# Altium PCB fmc-320u-a1.PcbDoc (part 2 of 2)
Units mm, origin at the board's own origin, x right, y up, seen from the top; angles counter-clockwise.
Board outline 96 x 84 mm, 2 copper layers (L1, L2), stack 0.533 mm thick; 72 components, 120 nets, 399 pads, 155 vias.
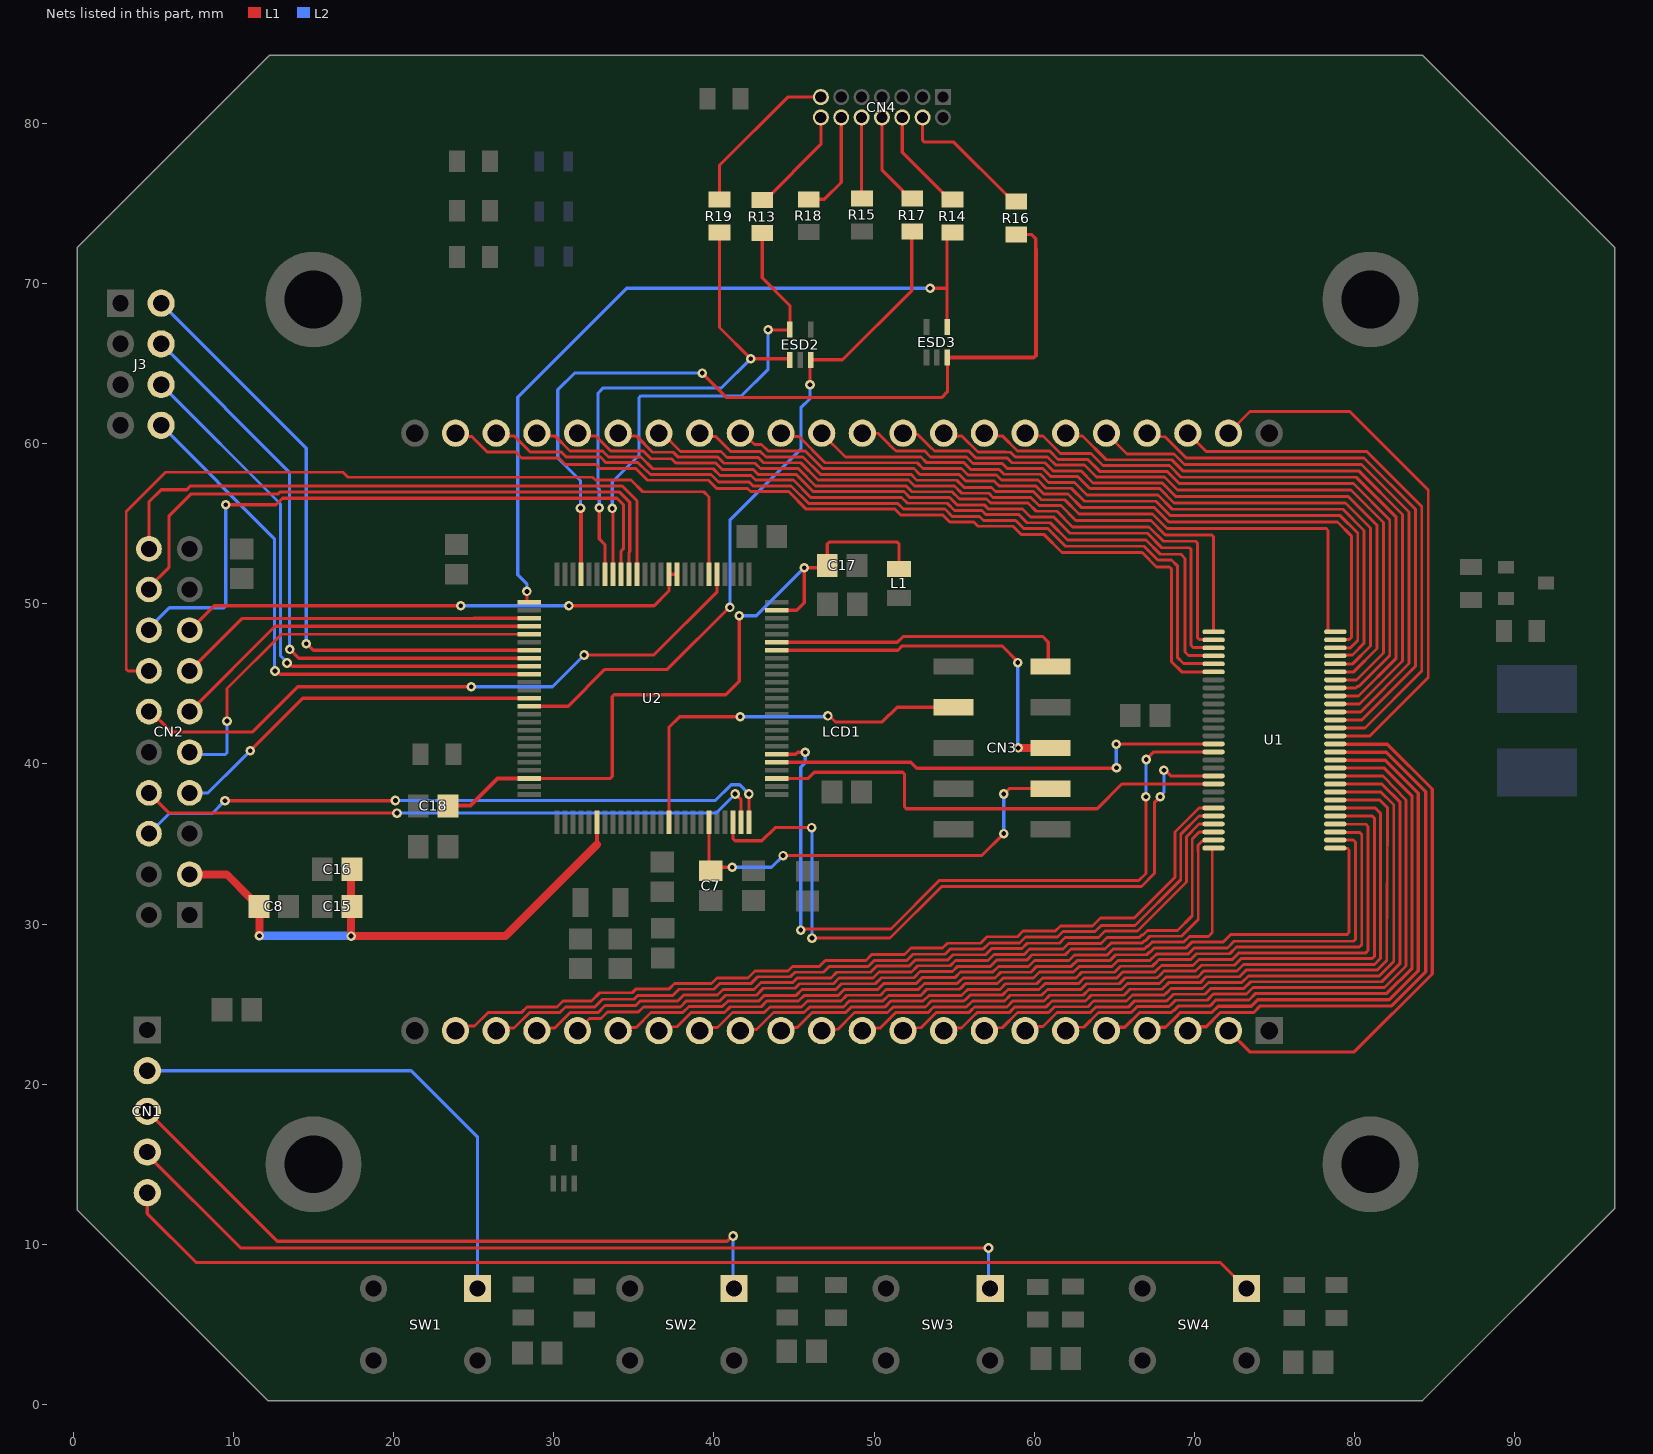
[diagram p2: the nets of this part, all layers, seen from the top]

## Via types
v1: diameter 0.6, hole 0.3, L1 to L2, 155 vias

## Nets (pads, with @x,y where several pads share a name; then routed paths per layer and width w, separated by ;. In a path a pad name is that pad's centre, name@x,y a point inside that pad or via, vN(x,y) a via of type N, cw(c..) or ccw(c..) an arc to the next point about the centre after c; other vN are vias at no path point) (continued)
PA8: CN2.16 U2.67 | length 41.3
  L1 w0.2: v1(9.525,56.185) 12.66,56.185 13.066,56.591 33.954,56.591 34.35,56.195 34.35,53.425 34.2,53.275 U2.67@34.2,51.838
  L2 w0.2: CN2.16@4.73,48.475 6.005,49.75 9.408,49.75 9.525,49.867 v1(9.525,56.185)
PAD_DOWN: CN1.5 SW4.1 | length 71.9
  L1 w0.2: CN1.5@4.625,13.23 4.625,11.925 7.675,8.875 71.625,8.875 SW4.1@73.25,7.25
PAD_ENTER: CN1.3 SW2.1 | length 43.4
  L1 w0.2: CN1.3@4.625,18.31 12.735,10.2 40.825,10.2 41.15,10.525 v1(41.2,10.525)
  L2 w0.2: v1(41.2,10.525) 41.2,7.3 SW2.1@41.25,7.25
PAD_ESC: CN1.2 SW1.1 | length 31.9
  L2 w0.2: CN1.2@4.625,20.85 4.725,20.75 4.825,20.85 21.1,20.85 25.25,16.7 SW1.1@25.25,7.25
PAD_UP: CN1.4 SW3.1 | length 57.7
  L1 w0.2: CN1.4@4.625,15.77 4.625,15.6 10.45,9.775 v1(57.15,9.775)
  L2 w0.2: v1(57.15,9.775) 57.15,7.35 SW3.1@57.25,7.25
PB10: CN3.5 U2.44 | length 23.2
  L1 w0.2: U2.44@43.938,47.1 51.494,47.1 51.765,47.371 57.988,47.371 58.979,46.38 v1(58.979,46.33) ; CN3.5@60.464,41 60.664,41.2 60.944,40.919 CN3.5@61.025,41
  L1 w0.5: v1(59,41) CN3.5@60.464,41
  L2 w0.2: v1(58.979,46.33) 58.979,41.021 v1(59,41)
PB11: CN3.9 U2.45 | length 18.8
  L1 w0.2: U2.45@43.938,47.6 51.457,47.6 51.812,47.955 60.528,47.955 60.876,47.607 60.876,46.229 CN3.9@61.025,46.08
PC8: CN2.20 U2.65 | length 38.6
  L1 w0.2: CN2.20@4.73,53.555 4.73,56.354 5.501,57.125 7.087,57.125 7.314,57.351 34.269,57.351 35.2,56.42 U2.65@35.2,51.838
PC9: CN2.18 U2.66 | length 39.2
  L1 w0.2: CN2.18@4.73,51.015 5.975,52.26 5.975,55.475 7.345,56.845 12.783,56.845 12.909,56.971 34.111,56.971 34.75,56.333 34.75,53.259 34.7,53.209 U2.66@34.7,51.838
PCF8553_CE: U1.20 U2.28 | length 30.2
  L1 w0.2: U2.28@43.938,39.1 45.9,39.1 46.275,39.475 51.783,39.475 51.9,39.358 51.9,37.317 52.017,37.2 63.925,37.2 65.475,38.75 U1.20@71.2,38.75
PCF8553_RESET: U1.15 U2.30 | length 28.9
  L1 w0.2: U2.30@43.938,40.1 52.3,40.1 52.675,39.725 65.1,39.725 v1(65.138,39.763) ; v1(65.125,41.225) 65.15,41.25 U1.15@71.2,41.25
  L2 w0.2: v1(65.125,41.225) 65.125,39.775 v1(65.138,39.763)
PCF8553_SCL: U1.19 U2.23 | length 46.2
  L1 w0.18: v1(46.125,29.125) 50.994,29.125 54.224,32.354 66.695,32.354 67.5,33.159 67.5,37.575 v1(67.875,37.95)
  L1 w0.2: U2.23@41.2,36.362 41.2,35.317 41.317,35.2 43.001,35.2 43.826,36.025 v1(46.1,36.025) ; v1(68.1,39.6) 68.178,39.6 68.528,39.25 U1.19@71.2,39.25
  L2 w0.2: v1(46.1,36.025) 46.125,36 v1(46.125,29.125) ; v1(67.875,37.95) 67.875,38.006 68.1,38.231 v1(68.1,39.6)
PCF8553_SDIO: U1.16 U2.31 | length 47.6
  L1 w0.18: v1(45.425,29.625) 45.495,29.695 51.055,29.695 54.075,32.714 60.972,32.714 60.973,32.715 66.523,32.715 66.975,33.168 v1(66.975,37.95)
  L1 w0.2: U2.31@43.938,40.6 45.1,40.6 45.225,40.725 v1(45.7,40.725) ; v1(67,40.275) 67.475,40.75 U1.16@71.2,40.75
  L2 w0.2: v1(45.425,29.625) 45.425,39.8 45.7,40.075 v1(45.7,40.725) ; v1(66.975,37.95) 66.975,40.25 v1(67,40.275)
PD1: J3.2 U2.82 | length 39.1
  L1 w0.2: v1(14.55,47.5) 14.599,47.5 14.999,47.1 U2.82@28.462,47.1
  L2 w0.2: J3.2@5.49,68.765 14.55,59.705 v1(14.55,47.5)
PD2: J3.4 U2.83 | length 37.6
  L1 w0.2: v1(13.525,47.15) 14.075,46.6 U2.83@28.462,46.6
  L2 w0.2: J3.4@5.49,66.225 13.5,58.215 v1@13.5,47.15
PD3: J3.6 U2.84 | length 35.8
  L1 w0.2: v1(13.35,46.3) 13.458,46.3 13.658,46.1 U2.84@28.462,46.1
  L2 w0.2: J3.6@5.49,63.685 12.945,56.23 12.945,46.744 13.35,46.339 v1(13.35,46.3)
PD4: J3.8 U2.85 | length 34.2
  L1 w0.2: v1(12.6,45.8) 12.708,45.8 12.908,45.6 U2.85@28.462,45.6
  L2 w0.2: J3.8@5.49,61.145 12.565,54.07 12.565,45.835 v1(12.6,45.8)
PD7: CN2.7 U2.88 | length 23.6
  L1 w0.2: v1(11.049,40.818) 14.331,44.1 U2.88@28.462,44.1
  L2 w0.2: CN2.7@7.27,38.19 8.414,38.19 10.524,40.3 10.531,40.3 v1(11.049,40.818)
PULSE_OUT_CMP: CN2.15 U2.60 U2.61 | length 32.4
  L1 w0.2: CN2.15@7.27,48.475 7.395,48.475 8.795,49.875 v1(24.2,49.875) ; v1(30.95,49.875) 36.266,49.875 37.201,50.81 37.201,51.837 U2.61@37.2,51.838 ; U2.61@37.201,51.789 37.25,51.838 U2.60@37.7,51.838
  L2 w0.2: v1(24.2,49.875) v1(30.95,49.875)
RTD_IN: CN3.8 U2.15 | length 24.6
  L1 w0.2: U2.15@37.2,36.362 37.2,42.291 37.859,42.95 v1(41.65,42.95) ; v1(47.117,43.002) 47.211,43.002 47.593,42.62 48.315,42.62 48.316,42.621 50.521,42.621 51.439,43.54 CN3.8@55,43.54
  L2 w0.2: v1(41.65,42.95) 47.065,42.95 v1(47.117,43.002)
SEG0: LCD1.21 U1.23 | length 54.7
  L1 w0.18: LCD1.21@23.87,23.35 24.161,23.641 25.063,23.641 25.892,24.47 27.977,24.47 28.337,24.83 30.216,24.83 30.578,25.192 32.361,25.192 32.88,25.711 34.904,25.711 35.152,25.959 37.211,25.959 37.541,26.289 39.854,26.289 40.205,26.64 42.134,26.64 42.566,27.072 44.625,27.072 44.908,27.356 46.584,27.356 46.96,27.732 49.501,27.732 49.861,28.092 51.893,28.092 52.3,28.499 54.28,28.499 54.585,28.804 56.643,28.804 57.05,29.21 58.955,29.21 59.306,29.561 61.312,29.561 61.643,29.891 63.644,29.891 64.131,30.378 66.242,30.378 68.788,32.924 68.788,35.754 70.283,37.25 U1.23@71.2,37.25
SEG1: LCD1.20 U1.24 | length 52
  L1 w0.18: LCD1.20@26.41,23.35 26.574,23.514 27.53,23.514 28.486,24.47 30.365,24.47 30.727,24.832 32.567,24.832 33.045,25.311 35.013,25.311 35.254,25.552 37.44,25.552 37.816,25.929 40.003,25.929 40.354,26.28 42.308,26.28 42.739,26.712 44.774,26.712 45.057,26.996 46.845,26.996 47.205,27.356 49.634,27.356 50.01,27.732 52.042,27.732 52.428,28.118 54.432,28.118 54.758,28.444 56.815,28.444 57.201,28.829 59.083,28.829 59.455,29.201 61.461,29.201 61.792,29.531 63.793,29.531 64.183,29.921 66.294,29.921 69.148,32.775 69.148,35.605 70.292,36.75 U1.24@71.2,36.75
SEG2: LCD1.19 U1.25 | length 49.3
  L1 w0.18: LCD1.19@28.95,23.35 29.114,23.514 30.07,23.514 31.026,24.47 32.77,24.47 33.211,24.911 35.122,24.911 35.404,25.192 37.74,25.192 38.117,25.569 40.225,25.569 40.576,25.92 42.506,25.92 42.938,26.352 44.923,26.352 45.207,26.636 47.311,26.636 47.671,26.996 49.783,26.996 50.16,27.372 52.192,27.372 52.577,27.758 54.606,27.758 54.931,28.084 56.965,28.084 57.35,28.469 59.232,28.469 59.566,28.804 61.573,28.804 61.925,29.156 64.016,29.156 64.422,29.561 66.443,29.561 69.508,32.626 69.508,35.456 70.297,36.245 71.195,36.245 U1.25@71.2,36.25
SEG3: LCD1.18 U1.26 | length 47.6
  L1 w0.18: LCD1.18@31.49,23.35 32.245,24.105 32.944,24.105 33.35,24.511 35.281,24.511 35.602,24.832 37.913,24.832 38.29,25.209 40.374,25.209 40.725,25.56 42.656,25.56 43.087,25.992 45.072,25.992 45.356,26.276 47.461,26.276 47.821,26.636 49.932,26.636 50.309,27.012 52.341,27.012 52.726,27.398 54.755,27.398 55.081,27.724 57.114,27.724 57.499,28.109 59.381,28.109 59.715,28.444 61.794,28.444 62.146,28.796 64.165,28.796 64.539,29.17 66.561,29.17 66.71,29.319 66.791,29.319 67.071,29.599 68.946,29.599 69.868,30.521 69.868,35.307 70.311,35.75 U1.26@71.2,35.75
SEG4: LCD1.17 U1.27 | length 44.8
  L1 w0.18: LCD1.17@34.03,23.35 34.231,23.551 35.15,23.551 36.071,24.472 38.063,24.472 38.439,24.849 40.523,24.849 40.874,25.2 42.805,25.2 43.157,25.552 45.141,25.552 45.505,25.916 47.61,25.916 47.97,26.276 50.081,26.276 50.458,26.652 52.49,26.652 52.875,27.038 54.904,27.038 55.23,27.364 57.263,27.364 57.648,27.749 59.53,27.749 59.865,28.084 61.943,28.084 62.295,28.436 64.414,28.436 64.788,28.81 66.732,28.81 66.882,28.959 66.94,28.959 67.22,29.239 69.191,29.239 70.24,30.288 70.24,34.566 70.23,34.576 70.23,34.924 70.476,35.17 70.538,35.17 70.618,35.25 U1.27@71.2,35.25
SEG5: LCD1.16 U1.28 | length 42.4
  L1 w0.18: LCD1.16@36.57,23.35 36.811,23.591 37.69,23.591 38.588,24.489 40.672,24.489 41.023,24.84 42.954,24.84 43.306,25.192 45.29,25.192 45.65,25.552 47.777,25.552 48.141,25.916 50.23,25.916 50.603,26.289 52.635,26.289 53.024,26.678 55.075,26.678 55.401,27.004 57.412,27.004 57.764,27.356 59.646,27.356 60.014,27.724 62.166,27.724 62.518,28.076 64.563,28.076 64.938,28.45 66.881,28.45 67.031,28.599 67.09,28.599 67.369,28.879 69.34,28.879 69.692,29.231 70.883,29.231 71.12,29.468 71.12,34.695 71.145,34.695 U1.28@71.2,34.75
SEG6: LCD1.15 U1.29 | length 49.1
  L1 w0.18: LCD1.15@39.11,23.35 39.298,23.538 40.23,23.538 41.172,24.48 43.149,24.48 43.501,24.832 45.48,24.832 45.84,25.192 47.937,25.192 48.3,25.556 50.397,25.556 50.751,25.91 52.766,25.91 53.145,26.289 55.19,26.289 55.288,26.386 55.293,26.386 55.55,26.644 57.561,26.644 57.913,26.996 59.795,26.996 60.163,27.364 62.315,27.364 62.667,27.716 64.712,27.716 65.087,28.09 67.03,28.09 67.18,28.239 67.239,28.239 67.518,28.519 69.489,28.519 69.841,28.871 71.797,28.871 72.288,29.362 79.545,29.362 79.65,29.468 79.65,34.633 79.552,34.731 78.819,34.731 U1.29@78.8,34.75
SEG7: LCD1.14 U1.30 | length 48.2
  L1 w0.18: LCD1.14@41.65,23.35 41.711,23.411 42.665,23.411 43.726,24.472 45.629,24.472 45.989,24.832 48.086,24.832 48.45,25.196 50.546,25.196 50.9,25.55 52.915,25.55 53.294,25.929 55.34,25.929 55.437,26.026 55.442,26.026 55.699,26.284 57.71,26.284 58.062,26.636 59.961,26.636 60.325,27 62.461,27 62.816,27.356 64.862,27.356 65.236,27.73 67.227,27.73 67.376,27.879 67.388,27.879 67.652,28.143 69.623,28.143 69.99,28.511 72.064,28.511 72.479,28.926 79.94,28.926 80.05,29.036 80.05,35.133 79.933,35.25 U1.30@78.8,35.25
SEG8: LCD1.13 U1.31 | length 47.1
  L1 w0.18: LCD1.13@44.19,23.35 44.378,23.538 45.205,23.538 46.139,24.472 48.235,24.472 48.599,24.836 50.695,24.836 51.049,25.19 53.064,25.19 53.424,25.55 55.47,25.55 55.586,25.666 55.591,25.666 55.848,25.924 57.859,25.924 58.211,26.276 60.159,26.276 60.524,26.64 62.61,26.64 62.966,26.996 65.011,26.996 65.385,27.37 67.376,27.37 67.526,27.519 67.537,27.519 67.801,27.783 69.772,27.783 70.139,28.151 72.213,28.151 72.628,28.566 80.31,28.566 80.45,28.706 80.45,35.589 80.308,35.731 78.819,35.731 U1.31@78.8,35.75
SEG9: LCD1.12 U1.32 | length 46
  L1 w0.18: LCD1.12@46.73,23.35 46.817,23.437 47.745,23.437 48.784,24.476 50.844,24.476 51.199,24.83 53.213,24.83 53.573,25.19 55.619,25.19 55.735,25.306 55.74,25.306 55.997,25.564 58.008,25.564 58.361,25.916 60.309,25.916 60.673,26.28 62.759,26.28 63.115,26.636 65.16,26.636 65.534,27.01 67.525,27.01 67.675,27.159 67.686,27.159 67.95,27.423 69.921,27.423 70.289,27.791 72.362,27.791 72.777,28.206 80.706,28.206 80.85,28.35 80.85,36.089 80.708,36.231 78.819,36.231 U1.32@78.8,36.25
SEG10: LCD1.11 U1.33 | length 45
  L1 w0.18: LCD1.11@49.27,23.35 49.434,23.514 50.39,23.514 51.065,24.189 51.066,24.189 51.348,24.47 53.362,24.47 53.722,24.83 55.768,24.83 55.884,24.946 55.889,24.946 56.14,25.197 58.151,25.197 58.51,25.556 60.458,25.556 60.822,25.92 62.908,25.92 63.264,26.276 65.309,26.276 65.683,26.65 67.674,26.65 67.824,26.799 67.835,26.799 68.099,27.063 70.07,27.063 70.438,27.431 72.511,27.431 72.927,27.846 81.102,27.846 81.25,27.995 81.25,36.608 81.108,36.75 U1.33@78.8,36.75
SEG11: LCD1.10 U1.34 | length 43.7
  L1 w0.18: LCD1.10@51.81,23.35 51.989,23.529 52.93,23.529 53.871,24.47 55.917,24.47 56.033,24.586 56.038,24.586 56.282,24.83 58.293,24.83 58.659,25.196 60.607,25.196 60.971,25.56 63.057,25.56 63.413,25.916 65.458,25.916 65.832,26.29 67.823,26.29 67.973,26.439 67.984,26.439 68.248,26.703 70.219,26.703 70.587,27.071 72.661,27.071 73.072,27.483 81.247,27.483 81.61,27.846 81.61,36.934 81.294,37.25 U1.34@78.8,37.25
SEG12: LCD1.9 U1.35 | length 42.5
  L1 w0.18: LCD1.9@54.35,23.35 54.514,23.514 55.47,23.514 56.182,24.226 56.187,24.226 56.431,24.47 58.442,24.47 58.808,24.836 60.756,24.836 61.12,25.2 63.206,25.2 63.562,25.556 65.607,25.556 65.981,25.93 67.973,25.93 68.122,26.079 68.133,26.079 68.397,26.343 70.368,26.343 70.736,26.711 72.81,26.711 73.221,27.123 81.396,27.123 82.01,27.736 82.01,28.05 82.05,37.124 82.05,37.274 81.997,37.326 81.574,37.75 U1.35@78.8,37.75
SEG13: LCD1.8 U1.36 | length 41.1
  L1 w0.18: LCD1.8@56.89,23.35 57.069,23.529 58.01,23.529 58.957,24.476 60.905,24.476 61.269,24.84 63.356,24.84 63.711,25.196 65.756,25.196 66.13,25.57 68.122,25.57 68.271,25.719 68.282,25.719 68.546,25.983 70.517,25.983 70.885,26.351 72.959,26.351 73.371,26.763 81.546,26.763 82.45,27.667 82.45,37.29 82.45,37.439 82.397,37.492 81.639,38.25 U1.36@78.8,38.25
SEG14: LCD1.7 U1.37 | length 39.7
  L1 w0.18: LCD1.7@59.43,23.35 59.692,23.612 60.55,23.612 61.418,24.48 63.505,24.48 63.86,24.836 65.905,24.836 66.28,25.21 68.271,25.21 68.42,25.359 68.432,25.359 68.695,25.623 70.666,25.623 71.034,25.991 73.108,25.991 73.52,26.403 81.695,26.403 82.85,27.558 82.85,37.605 81.705,38.75 U1.37@78.8,38.75
SEG15: LCD1.6 U1.38 | length 38.3
  L1 w0.18: LCD1.6@61.97,23.35 62.176,23.556 63.09,23.556 64.009,24.476 66.054,24.476 66.429,24.85 68.42,24.85 68.569,24.999 68.581,24.999 68.829,25.248 70.8,25.248 71.183,25.631 73.257,25.631 73.669,26.043 81.87,26.043 83.21,27.383 83.21,37.754 83.16,37.806 81.876,39.145 81.771,39.25 U1.38@78.8,39.25
SEG16: LCD1.5 U1.39 | length 37
  L1 w0.2: LCD1.5@64.51,23.35 64.718,23.558 65.66,23.558 66.582,24.48 68.573,24.48 68.723,24.629 68.734,24.629 68.982,24.878 70.953,24.878 71.337,25.261 73.41,25.261 73.822,25.673 82.023,25.673 83.597,27.247 83.597,37.989 81.836,39.75 U1.39@78.8,39.75
SEG17: LCD1.4 U1.40 | length 35.6
  L1 w0.2: LCD1.4@67.05,23.35 67.057,23.343 67.273,23.558 68.2,23.558 68.891,24.249 69.122,24.48 71.093,24.48 71.48,24.867 73.553,24.867 73.96,25.273 82.161,25.273 83.977,27.089 83.977,38.175 81.921,40.231 78.819,40.231 U1.40@78.8,40.25
SEG18: LCD1.3 U1.41 | length 34.3
  L1 w0.2: LCD1.3@69.59,23.35 69.83,23.59 70.74,23.59 71.629,24.479 72.076,24.479 cw(c72.13,23.35) 72.184,24.479 73.703,24.479 74.116,24.892 82.317,24.892 84.45,27.025 84.45,38.268 81.987,40.731 78.819,40.731 U1.41@78.8,40.75
SEG19: LCD1.2 U1.42 | length 34
  L1 w0.2: LCD1.2@72.13,23.35 73.458,22.022 79.985,22.022 84.85,26.887 84.85,38.433 82.052,41.231 78.819,41.231 U1.42@78.8,41.25
SEG20: LCD1.43 U1.43 | length 34.1
  L1 w0.18: LCD1.43@72.13,60.65 73.48,62 79.7,62 84.6,57.1 84.6,45.4 80.95,41.75 U1.43@78.8,41.75
SEG21: LCD1.42 U1.44 | length 33.6
  L1 w0.18: LCD1.42@69.59,60.65 70.74,59.5 80.766,59.5 84.2,56.066 84.2,45.8 80.65,42.25 U1.44@78.8,42.25
SEG22: LCD1.41 U1.45 | length 34.9
  L1 w0.18: LCD1.41@67.05,60.65 67.274,60.426 68.17,60.426 69.496,59.1 80.6,59.1 83.8,55.9 83.8,46.1 80.45,42.75 U1.45@78.8,42.75
SEG23: LCD1.40 U1.46 | length 36.2
  L1 w0.18: LCD1.40@64.51,60.65 65.8,59.36 68.727,59.36 69.387,58.7 80.434,58.7 83.4,55.734 83.4,46.266 80.384,43.25 U1.46@78.8,43.25
SEG24: LCD1.39 U1.47 | length 37.6
  L1 w0.18: LCD1.39@61.97,60.65 62.149,60.471 63.02,60.471 64.501,58.99 68.588,58.99 69.278,58.3 80.269,58.3 83,55.569 83,46.431 80.319,43.75 U1.47@78.8,43.75
SEG25: LCD1.38 U1.48 | length 38.9
  L1 w0.18: LCD1.38@59.43,60.65 59.614,60.466 60.55,60.466 61.641,59.375 63.55,59.375 64.296,58.63 68.439,58.63 69.169,57.9 80.103,57.9 82.6,55.403 82.6,46.597 80.253,44.25 U1.48@78.8,44.25
SEG26: LCD1.37 U1.49 | length 40.3
  L1 w0.18: LCD1.37@56.89,60.65 57.054,60.486 58.01,60.486 58.966,59.53 60.977,59.53 61.492,59.015 63.345,59.015 64.09,58.27 68.29,58.27 69.06,57.5 79.937,57.5 82.2,55.237 82.2,46.763 80.287,44.85 80.2,44.85 80.1,44.75 U1.49@78.8,44.75
SEG27: LCD1.36 U1.50 | length 41.6
  L1 w0.18: LCD1.36@54.35,60.65 54.514,60.486 55.47,60.486 56.485,59.471 58.238,59.471 58.248,59.461 58.526,59.461 58.822,59.165 60.832,59.165 61.342,58.655 63.139,58.655 63.884,57.91 68.141,57.91 68.95,57.1 79.772,57.1 81.8,55.072 81.8,46.928 80.122,45.25 U1.50@78.8,45.25
SEG28: LCD1.35 U1.51 | length 42.9
  L1 w0.18: LCD1.35@51.81,60.65 51.903,60.557 52.743,60.557 53.513,59.787 53.77,59.53 55.917,59.53 56.336,59.111 58.089,59.111 58.099,59.101 58.323,59.101 58.619,58.805 60.683,58.805 61.193,58.295 62.933,58.295 63.679,57.55 67.991,57.55 68.841,56.7 79.606,56.7 81.4,54.906 81.4,47.2 79.95,45.75 U1.51@78.8,45.75
SEG29: LCD1.34 U1.52 | length 44.2
  L1 w0.18: LCD1.34@49.27,60.65 50.246,60.65 50.902,59.995 ccw(c51.81,60.65) 51.155,59.742 51.366,59.53 53.17,59.53 53.53,59.17 55.768,59.17 56.187,58.751 58.008,58.751 58.314,58.445 60.534,58.445 61.044,57.935 62.728,57.935 63.473,57.19 67.842,57.19 68.732,56.3 79.44,56.3 81,54.74 81,47.366 79.884,46.25 U1.52@78.8,46.25
SEG30: LCD1.33 U1.53 | length 45.1
  L1 w0.18: LCD1.33@46.73,60.65 48.218,59.162 52.938,59.162 53.29,58.81 55.619,58.81 56.038,58.391 57.814,58.391 58.122,58.083 60.387,58.083 60.895,57.575 62.522,57.575 63.297,56.8 67.723,56.8 68.623,55.9 79.275,55.9 80.6,54.575 80.6,47.531 79.869,46.8 U1.53@79.2,46.8
SEG31: LCD1.32 U1.54 | length 46.9
  L1 w0.18: LCD1.32@44.19,60.65 44.401,60.439 45.31,60.439 46.947,58.802 52.698,58.802 53.055,58.445 55.457,58.445 55.871,58.031 57.642,58.031 57.95,57.723 60.238,57.723 60.746,57.215 62.316,57.215 63.131,56.4 67.614,56.4 68.514,55.5 79.109,55.5 80.2,54.409 80.2,47.697 79.753,47.25 U1.54@78.8,47.25
SEG32: LCD1.31 U1.55 | length 48.2
  L1 w0.18: LCD1.31@41.65,60.65 41.823,60.65 42.528,59.945 42.978,59.945 43.393,59.53 45.71,59.53 46.798,58.442 52.492,58.442 52.86,58.074 55.319,58.074 55.722,57.671 55.921,57.671 55.923,57.671 55.924,57.671 56.893,57.658 57.506,57.658 57.558,57.605 57.801,57.363 60.089,57.363 60.597,56.855 62.111,56.855 62.966,56 67.505,56 68.405,55.1 78.943,55.1 79.8,54.243 79.8,47.886 79.683,47.769 78.819,47.769 U1.55@78.8,47.75
SEG33: LCD1.30 U1.56 | length 48.5
  L1 w0.18: LCD1.30@39.11,60.65 39.323,60.437 40.121,60.437 41.063,59.496 42.918,59.496 43.252,59.162 45.569,59.162 46.649,58.082 52.311,58.082 52.659,57.734 52.679,57.714 55.17,57.714 55.627,57.257 57.328,57.257 57.582,57.003 59.94,57.003 60.448,56.495 61.905,56.495 62.8,55.6 67.396,55.6 68.296,54.7 78.233,54.7 78.35,54.583 78.35,48.296 78.396,48.25 U1.56@78.8,48.25
SEG34: LCD1.29 U1.1 | length 43.2
  L1 w0.18: LCD1.29@36.57,60.65 36.786,60.65 37.923,59.512 40.437,59.512 40.813,59.136 42.769,59.136 43.103,58.802 45.42,58.802 46.5,57.722 52.162,57.722 52.53,57.354 55.021,57.354 55.478,56.897 57.179,56.897 57.433,56.643 59.791,56.643 60.299,56.135 61.665,56.135 62.6,55.2 67.287,55.2 68.187,54.3 71.083,54.3 71.2,54.183 U1.1@71.2,48.25
SEG35: LCD1.28 U1.2 | length 46
  L1 w0.18: LCD1.28@34.03,60.65 34.194,60.486 35.15,60.486 36.175,59.461 37.465,59.461 37.774,59.152 40.263,59.152 40.64,58.776 42.57,58.776 42.904,58.442 45.271,58.442 46.351,57.362 52.013,57.362 52.38,56.994 54.872,56.994 55.329,56.537 57.03,56.537 57.284,56.283 59.617,56.283 60.125,55.775 61.425,55.775 62.4,54.8 67.177,54.8 68.077,53.9 70.083,53.9 70.2,53.783 70.2,47.875 70.305,47.769 71.181,47.769 U1.2@71.2,47.75
SEG36: LCD1.27 U1.3 | length 48.8
  L1 w0.18: LCD1.27@31.49,60.65 31.654,60.486 32.61,60.486 33.566,59.53 35.597,59.53 36.072,59.055 37.362,59.055 37.625,58.792 40.114,58.792 40.512,58.395 42.442,58.395 42.755,58.082 45.122,58.082 46.202,57.002 51.864,57.002 52.231,56.634 54.723,56.634 55.18,56.177 56.881,56.177 57.135,55.923 59.266,55.923 59.774,55.415 61.219,55.415 62.234,54.4 67.068,54.4 67.968,53.5 69.683,53.5 69.8,53.383 69.8,47.396 69.923,47.273 71.177,47.273 U1.3@71.2,47.25
SEG37: LCD1.26 U1.4 | length 51.4
  L1 w0.18: LCD1.26@28.95,60.65 29.114,60.486 30.07,60.486 31.026,59.53 33.057,59.53 33.07,59.517 33.417,59.17 35.448,59.17 36.186,58.432 39.965,58.432 40.384,58.014 42.314,58.014 42.606,57.722 44.972,57.722 46.052,56.642 51.714,56.642 52.082,56.274 54.574,56.274 55.031,55.817 56.732,55.817 56.986,55.563 59.042,55.563 59.55,55.055 60.999,55.055 62.079,53.975 66.984,53.975 67.869,53.09 69.16,53.09 69.418,52.832 69.418,46.99 69.635,46.773 71.177,46.773 U1.4@71.2,46.75
SEG38: LCD1.25 U1.5 | length 54.1
  L1 w0.18: LCD1.25@26.41,60.65 26.574,60.486 27.53,60.486 28.529,59.487 30.456,59.487 30.786,59.157 32.921,59.157 33.268,58.81 35.273,58.81 35.79,58.293 35.816,58.293 36.037,58.072 39.816,58.072 40.281,57.607 42.211,57.607 42.457,57.362 44.823,57.362 45.92,56.265 51.481,56.265 51.833,55.914 54.425,55.914 54.882,55.457 56.582,55.457 56.836,55.203 58.843,55.203 59.351,54.695 60.85,54.695 61.951,53.594 66.856,53.594 67.72,52.73 68.58,52.73 68.936,52.375 68.936,46.66 69.322,46.273 71.177,46.273 U1.5@71.2,46.25
SEG39: LCD1.24 U1.6 | length 56.9
  L1 w0.18: LCD1.24@23.87,60.65 24.083,60.437 24.881,60.437 25.832,59.487 27.61,59.487 27.991,59.106 30.328,59.106 30.73,58.704 32.646,58.704 32.9,58.45 35.124,58.45 35.861,57.712 39.667,57.712 40.178,57.201 42.109,57.201 42.308,57.002 44.674,57.002 45.771,55.905 51.309,55.905 51.66,55.554 54.275,55.554 54.733,55.097 56.231,55.097 56.485,54.843 58.671,54.843 59.179,54.335 60.602,54.335 61.737,53.2 66.741,53.2 67.641,52.3 68.445,52.3 68.563,52.183 68.563,46.397 69.209,45.75 U1.6@71.2,45.75
SPI3_MISO: CN2.11 U2.79 | length 23.4
  L1 w0.2: CN2.11@7.27,43.27 12.6,48.6 U2.79@28.462,48.6
SPI3_MOSI: CN2.9 U2.80 | length 26.8
  L1 w0.18: v1(9.601,42.672) 9.601,44.701 13,48.1 25.295,48.1 U2.80@28.462,48.1
  L2 w0.18: CN2.9@7.27,40.73 7.409,40.869 7.688,40.589 9.496,40.589 9.601,40.695 v1(9.601,42.672)
SPI3_SCK: CN2.13 U2.78 | length 22.6
  L1 w0.2: CN2.13@7.27,45.81 10.535,49.075 24.978,49.075 25.003,49.1 U2.78@28.462,49.1
SWCLK: ESD3.4 R14.2 U2.76 | length 48.9
  L1 w0.2: v1(28.325,50.775) 28.325,50.15 28.375,50.1 U2.76@28.462,50.1 U2.76@28.425,50.137 ; v1(53.5,69.7) 54.55,69.7 ; ESD3.4@54.574,67.269 54.55,67.294 54.55,69.7 ; R14.2@54.9,73.173 54.55,72.823 54.55,69.7
  L2 w0.2: v1(28.325,50.775) 28.325,51.24 27.75,51.815 27.75,62.9 34.55,69.7 v1(53.5,69.7)
SWDIO: ESD3.3 R16.2 U2.72 | length 54
  L1 w0.2: v1(31.675,55.975) v1@31.7,55.95 ; v1(39.275,64.4) 40.805,62.87 54.22,62.87 54.58,63.23 54.58,65.363 ESD3.3@54.574,65.369 ; R16.2@58.875,73.048 59.85,73.048 60.1,72.798 60.1,72.125
  L1 w0.25: U2.72@31.7,51.838 v1@31.7,55.95 ; ESD3.3@54.574,65.369 59.954,65.369 60.1,65.516 60.1,72.125
  L2 w0.2: v1(31.675,55.975) 31.675,57.675 30.25,59.1 30.25,63.35 31.3,64.4 v1(39.275,64.4)
SWO: ESD2.3 R17.2 U2.89 | length 44.1
  L1 w0.2: U2.89@28.462,43.6 30.9,43.6 33.2,45.9 37.1,45.9 40.975,49.775 v1(41,49.775) ; v1(46,63.675) 46,65.182 ESD2.3@46.05,65.232 48.032,65.232 52.356,69.556 52.356,72.931 R17.2@52.375,72.95
  L2 w0.2: v1(41,49.775) 41,55.217 45.437,59.654 45.437,62.237 46,62.8 v1(46,63.675)
T_JTDI: CN4.10 R15.1 | length 5.1
  L1 w0.2: CN4.10@49.22,80.365 49.22,75.332 R15.1@49.25,75.302
T_NRST: CN4.12 R18.1 | length 6.5
  L1 w0.2: R18.1@45.925,75.252 46.9,75.252 47.95,76.302 CN4.12@47.95,80.365
T_SWCLK: CN4.6 R14.1 | length 6.5
  L1 w0.2: CN4.6@51.76,80.365 51.76,78.192 54.725,75.227 R14.1@54.9,75.227
T_SWDIO: CN4.4 R16.1 | length 8.9
  L1 w0.2: CN4.4@53.03,80.365 53.03,78.942 53.147,78.825 54.977,78.825 58.3,75.502 58.7,75.102 R16.1@58.875,75.102
T_SWO: CN4.8 R17.1 | length 6
  L1 w0.2: CN4.8@50.49,80.365 50.49,77.088 51.8,75.778 51.8,75.69 52.2,75.29 R17.1@52.375,75.29
T_VCP_RX: CN4.13 R19.1 | length 10.2
  L1 w0.2: R19.1@40.35,75.227 40.35,77.375 44.61,81.635 CN4.13@46.68,81.635
T_VCP_TX: CN4.14 R13.1 | length 6.8
  L1 w0.2: R13.1@43.025,75.202 43.2,75.202 46.68,78.682 CN4.14@46.68,80.365
USART1_RX: ESD2.1 R19.2 U2.69 | length 33.1
  L1 w0.2: v1(32.85,56) 32.85,54.05 33.2,53.7 U2.69@33.2,51.838 ; R19.2@40.35,73.173 40.35,67.25 v1(42.3,65.3) 44.682,65.3 ESD2.1@44.75,65.232
  L2 w0.2: v1(32.85,56) 32.85,57.142 32.766,57.226 32.766,63.144 33.097,63.475 40.475,63.475 v1(42.3,65.3)
USART1_TX: ESD2.5 R13.2 U2.68 | length 31.1
  L1 w0.2: v1(33.655,55.956) 33.7,55.911 U2.68@33.7,51.838 ; R13.2@43.025,73.148 43.025,70.35 44.75,68.625 ESD2.5@44.75,67.132 ; v1(43.388,67.113) 43.4,67.1 ESD2.5@44.75,67.1
  L2 w0.2: v1(33.655,55.956) 33.655,57.605 35.325,59.275 35.325,62.858 35.442,62.975 41.725,62.975 43.388,64.638 v1(43.388,67.113)
USART2_RX: CN2.6 U2.25 | length 40.7
  L1 w0.2: v1(9.475,37.7) 20.098,37.7 v1(20.117,37.719) ; v1(42.189,38.125) 42.189,36.373 U2.25@42.2,36.362
  L2 w0.2: CN2.6@4.73,35.65 5.986,36.906 8.681,36.906 v1(9.475,37.7) ; v1(20.117,37.719) 40.099,37.719 41.086,38.705 41.609,38.705 v1(42.189,38.125)
USART2_TX: CN2.8 U2.24 | length 39.5
  L1 w0.2: CN2.8@4.73,38.19 5.988,36.932 v1(20.218,36.932) ; v1(41.326,38.125) 41.33,38.125 41.7,37.755 U2.24@41.7,36.362
  L2 w0.2: v1(20.218,36.932) 40.132,36.932 v1(41.326,38.125)
USART3_RX: CN2.12 U2.55 | length 40.8
  L1 w0.2: CN2.12@4.73,43.395 6.125,42 11.2,42 14.025,44.825 v1(24.85,44.825) ; v1(31.9,46.8) 36.257,46.8 40.2,50.743 U2.55@40.2,51.838
  L2 w0.2: v1(24.85,44.825) 29.925,44.825 v1(31.9,46.8)
USART3_TX: CN2.14 U2.56 | length 54.2
  L1 w0.18: CN2.14@4.73,45.81 3.419,45.81 3.314,45.915 3.314,55.765 5.764,58.215 16.842,58.215 17.157,57.9 32.432,57.9 32.602,57.73 34.826,57.73 35.563,56.992 39.369,56.992 39.7,56.661 U2.56@39.7,51.838
VBAT: C8.1 C15.1 C16.1 CN2.3 U2.6 | length 36.1
  L1 w0.25: 32.7,34.961 32.7,36.325 U2.6@32.7,36.362
  L1 w0.5: CN2.3@7.27,33.11 9.586,33.11 11.121,31.575 11.196,31.575 11.596,31.175 C8.1@11.596,31.1 11.623,31.073 v1(11.623,29.273) ; C16.1@17.36,33.467 17.36,31.14 17.35,31.13 v1(17.35,29.25) 26.989,29.25 32.7,34.961
  L2 w0.5: v1(11.623,29.273) 17.327,29.273 v1(17.35,29.25)
VDD11_1&2: C17.1 C18.1 L1.1 U2.49 U2.98 | length 47
  L1 w0.2: U2.98@28.462,39.1 33.533,39.1 33.65,39.217 33.65,44.208 33.767,44.325 40.745,44.325 41.58,45.16 v1(41.58,49.251) ; U2.49@43.938,49.6 45.175,49.6 45.644,50.069 v1(45.644,52.248) 46.931,52.248 C17.1@47.08,52.396 47.08,53.731 47.197,53.848 51.445,53.848 51.562,53.731 L1.1@51.562,51.943
  L1 w0.25: C18.1@23.441,37.414 24.809,37.414 26.495,39.1 U2.98@28.462,39.1
  L1 w0.35: C18.1@23.402,37.375 C18.1@23.441,37.414
  L2 w0.2: v1(41.58,49.251) 42.647,49.251 v1(45.644,52.248)
VREF+: C7.1 CN3.3 U2.20 | length 27.6
  L1 w0.2: U2.20@39.7,36.362 39.7,33.7 39.85,33.55 v1(41.15,33.55) ; v1(44.325,34.275) 44.331,34.281 56.731,34.281 v1(58.1,35.65) ; v1(58.1,38.125) 58.435,38.46 CN3.3@61.05,38.46
  L2 w0.2: v1(41.15,33.55) 43.6,33.55 v1(44.325,34.275) ; v1(58.1,35.65) v1(58.1,38.125)
pads on no net: CN4.1 CN4.2 CN4.9 ESD3.5 PTH1.1 PTH2.1 PTH3.1 PTH4.1 U1.17 U1.18 U1.22 U2.1 U2.2 U2.3 U2.4 U2.5 U2.7 U2.12 U2.13 U2.29 U2.32 U2.33 U2.34 U2.35 U2.36 U2.37 U2.42 U2.52 U2.53 U2.54 U2.57 U2.58 U2.59 U2.62 U2.63 U2.64 U2.70 U2.71 U2.81 U2.86 U2.87 U2.90
copper on no net: | length 0

## Polygon pours and split planes (outlines as drawn)
GND on L2 "GND_L02_P000" (solid, remove dead copper, pour order 0): 0.25,72.25 12.25,84.25 84.3,84.3 96.3,72.3 96.25,12.25 84.25,0.25 12.15,0.25 0.25,12.15

## Keep-outs
Keep-Out Layer:
  the board outline again, w0.01

## Silkscreen, mask and mechanical layers (free items; w line width, h text height)
Top Overlay:
  drawing of 25 lines, arcs and shapes, not listed
  text "S/N" at 12.175,80.775 h2
  text "RX" at 39.45,76.475 h1
  text "TX" at 42.05,76.475 h1
  text "RST" at 44.525,76.475 h1
  text "JTDI" at 47.525,76.475 h1
  text "SWO" at 51.475,76.475 h1
  text "SWCLK" at 56.3,76.45 h1 r270
  text "SWDIO" at 60.325,76.45 h1 r270
  text "RW" at 5.8,75.05 h2
  text "FMC-320U-A1 V1R1R1" at 63.25,73.525 h2
  text "LOTE 231028" at 63.25,71.6 h2
  text "Q.C." at 63.275,68.3 h2
  text "PD1" at 7.75,68.25 h1.25
  text "PD2" at 7.75,65.71 h1.25
  text "PD3" at 7.75,63.17 h1.25
  text "...S20 C2" at 66.4,62.3 h1.25
  text "C3 S39..." at 19.65,62.175 h1.25
  text "PD4" at 7.75,60.63 h1.25
  text "44" at 76.475,60.125 h1.25
  text "23" at 17.575,59.9 h1.25
  text "20" at 0.75,52.7 h1.25
  text "18" at 0.975,50.375 h1.25
  text "16" at 1.025,47.85 h1.25
  text "9" at 62.65,45.275 h1.25
  text "14" at 1.025,45.225 h1.25
  text "7" at 62.75,42.875 h1.25
  text "12" at 1.025,42.725 h1.25
  text "5" at 62.675,40.325 h1.25
  text "10" at 0.975,40.2 h1.25
  text "3" at 62.8,37.85 h1.25
  text "8" at 1.475,37.6 h1.25
  text "6" at 1.425,35.2 h1.25
  text "4" at 1.15,32.675 h1.25
  text "2" at 1.4,30 h1.25
  text "GND" at 1.95,27.45 h1.25
  text "DVDD" at 6.825,27.45 h1.25
  text "22" at 17.675,22.7 h1.25
  text "C0 S0..." at 19.725,20.675 h1.25
  text "...S19 C1" at 66.525,20.625 h1.25
  text "Esc" at 6.575,20.225 h1.25
  text "Enter" at 6.575,17.4 h1.25
  text "UP" at 6.575,14.85 h1.25
  text "DOWN" at 6.575,12.525 h1.25
Bottom Overlay:
  lines w0.5: 36.7,9.4 38.859,11.559 36.725,13.693 ; 51.3,10.722 53.446,12.868 55.593,10.722 ; 67.699,12.379 69.845,10.233 71.991,12.379
  text "20" at 2.8,52.775 h1.25
  text "18" at 2.8,50.45 h1.25
  text "16" at 2.8,47.925 h1.25
  text "14" at 2.8,45.3 h1.25
  text "12" at 2.8,42.8 h1.25
  text "10" at 2.8,40.275 h1.25
  text "8" at 2.8,37.675 h1.25
  text "6" at 2.8,35.275 h1.25
  text "4" at 2.8,32.675 h1.25
  text "2" at 2.8,30 h1.25
  text "DVDD" at 11.375,27.45 h1.25
  text "GND" at 5.3,27.425 h1.25
  text "Esc" at 10.017,20.375 h1.25
  text "Enter" at 11.825,17.45 h1.25
  text "UP" at 8.768,15 h1.25
  text "DOWN" at 11.267,12.675 h1.25
  text "Esc" at 25.375,9.55 h2.5
Top Courtyard (Mech15):
  lines w0.508: 110.975,40.88 181.98,40.92 ; 131.975,35.15 131.975,52.15 ; 161.025,35.205 161.025,40.92 ; 181.98,35.15 110.975,35.15 110.975,52.15 ; 181.98,52.15 110.975,52.15 ; 182.085,35.15 182.085,59.15 110.975,59.15 110.975,52.15
  text "FLOWMEET S.R.L." at 127.37,53.681 h5.08
  text "Board ID" at 111.975,49.176 h2.54
  text "Software" at 133.975,49.178 h2.54
  text "Altium Designer v20.2.4" at 135.975,44.866 h3.81
  text "fmc-320u-a1" at 111.955,44.243 h3.81
  text "Date" at 111.975,38.899 h1.91
  text "File Name" at 133.975,38.899 h1.91
  text "Engineer" at 162.295,38.738 h1.91
  text "31/10/2023" at 113.975,36.178 h2.54
  text "fmc-320u-a1.PcbDoc" at 135.975,36.178 h2.54
  text "DHS" at 163.565,35.868 h2.54
  text "Notes:" at 104.875,27.725 h2.5
  text "1) SMD diodes/LEDs mark is for CATHODE." at 108.179,23.954 h1.52
  text "2) All capacitors are ceramic with no polarity." at 108.029,21.337 h1.52

## Dimensions
84.25,84.25 to 84.25,0.25 on Top Courtyard (Mech15)
0.25,72.25 to 96.25,72.25 on Top Courtyard (Mech15)

## Text inside footprints (layer, text, board x,y; h text height)
CN3: Top Overlay "1" at 62.975,35.35 h1.25
LCD1: Top Overlay "1" at 76.604,22.604 h1.52
LD1: Bottom Courtyard "Cathode" at 32.25,76.65 h0.3 r270
LD2: Bottom Courtyard "Cathode" at 32.25,73.55 h0.3 r270
LD3: Bottom Courtyard "Cathode" at 32.25,70.725 h0.3 r270